# EAGLE board lipolski-control (EAGLE 7.7.0)
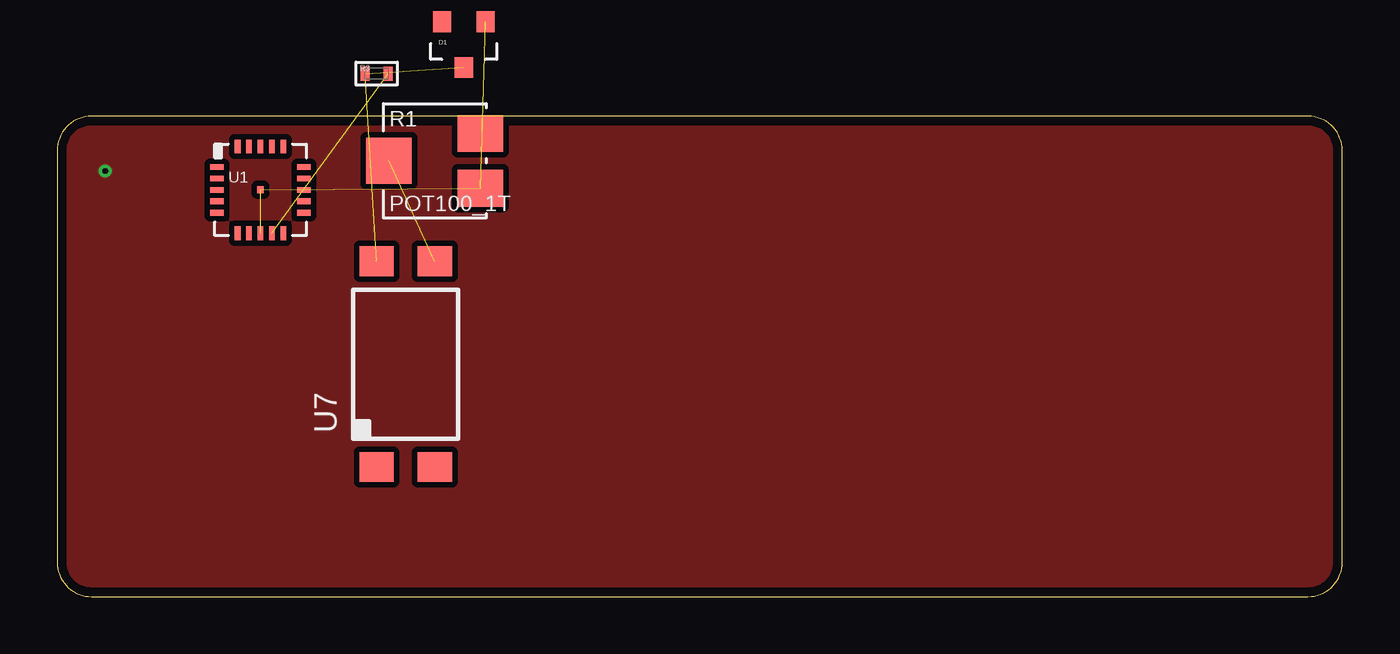
[diagram p0: board, top side]

Size 56.2 x 21 mm. Coordinates in mm from the lower left corner, seen from the top.
Outline: 0,1.5 arc90 1.5,0 54.7,0 arc90 56.2,1.5 56.2,19.5 arc90 54.7,21 1.5,21 arc90 0,19.5 0,1.5
Copper layers (1+2*15+16): Top 1mil / dielectric 0.2mm / Route2 0.5mil / dielectric 1.2mm / Route15 0.5mil / dielectric 0.2mm / Bottom 1mil
Design rules "OSHPark": minimum track width 0.15mm, minimum drill 0.25mm, track to track 0.15mm, track to pad 0.15mm, pad to pad 0.15mm, via to via 0.15mm, smd to smd 0mil, copper to edge 0.4mm, drill to drill 0.2mm, minimum pad ring 0.15mm, minimum via ring 0.15mm, stop-mask expansion 0.01mm, vias tented up to drill 0.5mm, thermal gap 0.2mm

## Footprints (pad centres in the part's own frame; a part is rotated, then mirrored left to right if it is on the bottom)
SOT23-3 = smd 0.8 x 0.9: 1 0.95,1; 2 -0.95,1; 3 0,-1
ST-4EA = smd 2 x 1.6: 1 2,1.2; 3 2,-1.2 | smd 2 x 2: 2 -2,0
0402 = smd 0.4 x 0.6: 1 -0.5,0; 2 0.5,0
ATTINYX4A = smd 0.6 x 0.25: 1 -1.9,1; 2 -1.9,0.5; 3 -1.9,0; 4 -1.9,-0.5; 5 -1.9,-1; 11 1.9,-1; 12 1.9,-0.5; 13 1.9,0; 14 1.9,0.5; 15 1.9,1 | smd 0.25 x 0.6: 6 -1,-1.9; 7 -0.5,-1.9; 8 0,-1.9; 9 0.5,-1.9; 10 1,-1.9; 16 1,1.9; 17 0.5,1.9; 18 0,1.9; 19 -0.5,1.9; 20 -1,1.9 | smd 0.3 x 0.3: PAD 0,0
4-OPTO-1 = smd 1.5 x 1.3: 1 -1.27,-4.5; 2 1.27,-4.5; 3 1.27,4.5; 4 -1.27,4.5

## Placement (x,y rotation side)
D1  D_ZENER3V  [SOT23-3]  17.78,24.13 0 top
R1  POT100_1T  [ST-4EA]  16.51,19.05 0 top
R3  RES590_16  [0402]  13.97,22.86 0 top
U1  ATTINYX4A8MU  [ATTINYX4A]  8.89,17.78 0 top
U7  LTV-816S  [4-OPTO-1]  15.24,10.16 0 top

## Library data of the parts
D1 = dubec; DIGIKEY_PART_#: BZX84B3V0-FDICT-ND; EURO: 34.78/1000; IR: 10µA @ 1V; MANUFACTURER: Diodes Incorporated; MFG_PART_#: BZX84B3V0-7-F; TOLERANCE: ±2%; ZZT: 95 Ohm
R1 = dubec; DIGIKEY_PART_#: ST4ETA101CT-ND; EURO: 588.71/1000; MANUFACTURER: Copal Electronics Inc.; MFG_PART_#: ST4ETA101; POWER: 1/4W; TEMP: ±100ppm/°C; TOLERANCE: ±20%
R3 = dubec; DIGIKEY_PART_#: 541-590LCT-ND; EURO: 2.27/50; MANUFACTURER: Vishay Dale; MFG_PART_#: CRCW0402590RFKED; TEMP: ±100ppm/°C; TOLERANCE: ±1%
U1 = dubec; ADC: 8x10b; DIGIKEY_PART_#: ATTINY84A-MU-ND; EURO: 637.90/1000; FLASH: 8KB (4K x 16); FREQ: 20MHz; MANUFACTURER: Atmel; MFG_PART_#: ATTINY84A-MU; RAM: 512 x 8; TEMP: -40°C ~ 85°C (TA); VCC: 1.8 V ~ 5.5 V
U7 = dubec; DIGIKEY_PART_#: 160-1361-5-ND; EURO: 5.67/25; I_FWD: 50mA; MANUFACTURER: Lite-On Inc.; MFG_PART_#: LTV-816S; TEMP: -50°C ~ 110°C

## Nets
FB: R1.2 U7.3
N$1: D1.3 R3.1 U7.4
N$3: U1.5
N$4: U1.4
N$5: U1.3
N$6: U1.2
N$7: U1.1
N$8: U1.20
N$10: U1.13
N$11: U1.14
N$12: U1.12
N$13: U1.11
N$14: U1.15
N$15: U1.16
OPTO_A: U7.1
OPTO_C: U7.2
S-: D1.1 R1.3 U1.8 U1.PAD
VCC: R3.2 U1.9

## Tracks (layer width: path | path; a pad name or v marks a point on that pad's centre or on a via)
BATT-  (via drill 0.25)
  other vias: 2.1,18.6
  pour Top (isolate 0.25, no thermals): 0,0 56.1,0 56.1,21 0,21
FB  (1 unrouted)
N$1  (2 unrouted)
S-  (3 unrouted)
VCC  (1 unrouted)